# EAGLE board monjolo_b (EAGLE 5.11)
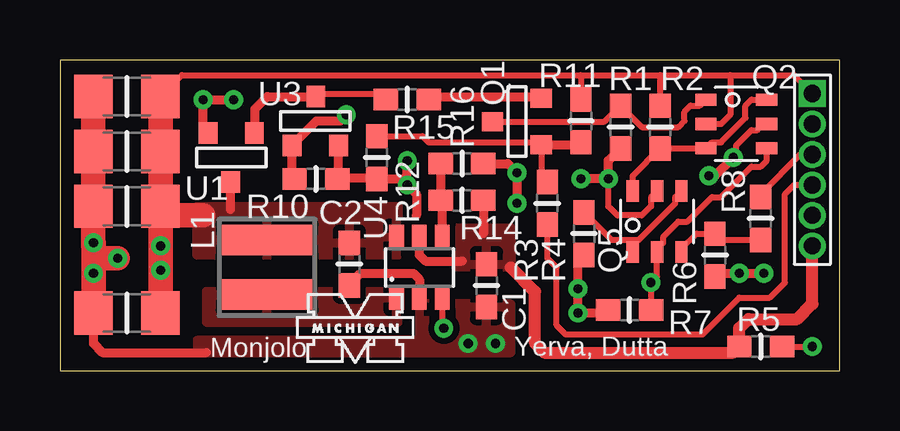
[diagram p0: board, top side]
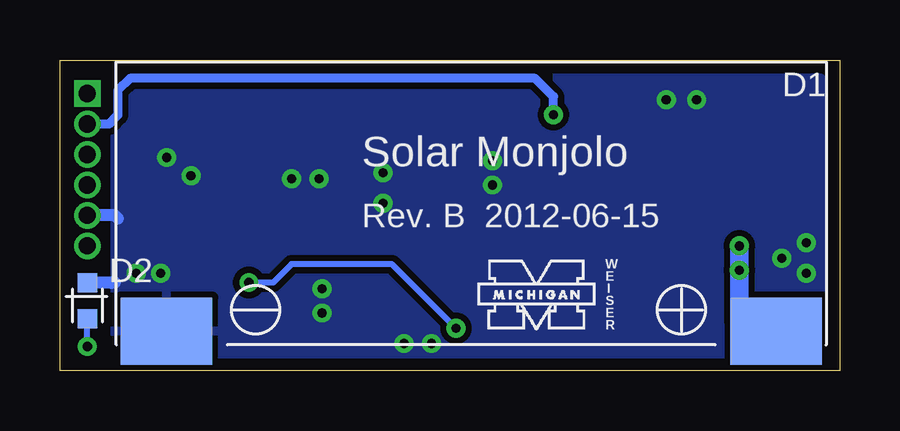
[diagram p1: board, bottom side, seen from below]

Size 32.51 x 12.95 mm. Coordinates in mm from the lower left corner, seen from the top.
Outline: 32.51,0 32.51,12.95 0,12.95 0,0 32.51,0
Copper layers (1*16): Top 0.0178mm / dielectric 1.4986mm / Bottom 0.0178mm
Design rules "SSC-EAGLE-2Lyr_v1.0.0.3 *": minimum track width 6mil, minimum drill 14mil, track to track 6mil, track to pad 6mil, pad to pad 6mil, via to via 6mil, smd to smd 6mil, copper to edge 20mil, drill to drill 16mil, minimum pad ring 8mil, minimum via ring 8mil, stop-mask expansion 3mil, vias tented up to drill 20mil, thermal gap 10mil

## Footprints (pad centres in the part's own frame; a part is rotated, then mirrored left to right if it is on the bottom)
R0603B = smd 1.016 x 0.889: 1 -0.889,0; 2 0.889,0
C1206 = smd 1.6 x 1.8: 1 -1.4,0; 2 1.4,0
AM-1437 = smd 3.81 x 2.794: + 12.7,-5.334; - -12.7,-5.334
LED-0603 = smd 0.8 x 0.8: A 0,-0.75; C 0,0.75
HD6 = drill 0.711 pad 1.016 square: 1 -2.54,0 | drill 0.711 pad 1.016 round: 2 -1.27,0; 3 0,0; 4 1.27,0; 5 2.54,0; 6 3.81,0
L2828 = smd 1.27 x 3.81: 1 -1.143,0; 2 1.143,0
SOT-23 = smd 0.787 x 0.889: 1 0.025,-1.016; 2 -0.94,1.016; 3 0.991,1.016
TSOP-6 = smd 0.508 x 0.889: 1 -1.016,-1.27; 2 0,-1.27; 3 1.016,-1.27; 4 1.016,1.27; 5 0,1.27; 6 -1.016,1.27
MINI-3DC = smd 0.787 x 0.889: 1 -0.991,-1.016; 2 0.94,-1.016; 3 0,1.016
SOT-23-6 = smd 0.61 x 1.016: 1 -0.953,-1.27; 2 0,-1.27; 3 0.953,-1.27; 4 0.953,1.27; 5 0,1.27; 6 -0.953,1.27

## Placement (x,y rotation side)
C1  10uF  [R0603B]  17.78,3.56 270 top
C1A  TBD  [C1206]  2.79,11.43 180 top
C1B  TBD  [C1206]  2.79,9.14 180 top
C1C  TBD  [C1206]  2.79,6.86 180 top
C1D  TBD  [C1206]  2.79,2.41 180 top
C2  4.7uF  [R0603B]  12.06,4.45 270 top
D1  AM-1437  [AM-1437]  15.37,6.99 0 bottom
D2  [LED-0603]  31.37,2.92 0 bottom
JP1  [HD6]  31.37,9.02 270 top
L1  4.7uH  [L2828]  8.64,4.32 270 top
Q1  [SOT-23]  19.05,10.41 270 top
Q2  DUAL_MOSFET_NP  [TSOP-6]  28.19,10.29 270 top
Q5  DUAL_MOSFET_NP  [TSOP-6]  24.89,6.22 0 top
R1  100K  [R0603B]  23.37,10.16 270 top
R2  1M  [R0603B]  25.02,10.16 270 top
R3  1K  [R0603B]  20.32,6.99 90 top
R4  1M  [R0603B]  21.84,5.71 270 top
R5  470  [R0603B]  29.21,1.02 0 top
R6  100K  [R0603B]  27.3,4.83 270 top
R7  1M  [R0603B]  23.75,2.54 180 top
R8  1K  [R0603B]  29.21,6.35 270 top
R10  1K  [R0603B]  10.67,8 0 top
R11  100K  [R0603B]  21.72,10.41 270 top
R12  DNP  [R0603B]  13.21,8.89 270 top
R14  976K  [R0603B]  16.76,7.11 180 top
R15  100K  [R0603B]  14.48,11.3 0 top
R16  649K  [R0603B]  16.76,8.64 0 top
U1  MN1382S 2.0V  [MINI-3DC]  7.11,8.89 180 top
U3  TC54VC 2.9V  [MINI-3DC]  10.67,10.41 0 top
U4  MCP1640T  [SOT-23-6]  14.99,4.32 0 top
U$1  [UMICH]  15.18,1.52 0 bottom
U$2  [UMICH]  9.78,0.13 0 top

## Library data of the parts
C1 C2 JP1 L1 R1-R8 R10-R12 R14-R16 U4 = Gecko
C1A C1B C1C C1D D1 D2 U1 U3 U$1 U$2 = umich
Q1 = berkeley-epic
Q2 Q5 =  gecko_vreg_revC

## Nets
GND: C1.2 C1A.2 C1B.2 C1C.2 C1D.2 C2.2 D1.- D2.C JP1.5 Q2.5 Q5.5 R1.2 R4.2 R6.2 R7.2 R10.2 R12.2 R16.2 U1.2 U3.2 U4.2
N$1: R14.2 R16.1 U4.4
N$2: Q1.2 R15.2
N$4: L1.2 U4.1
N$5: D2.A R5.2
N$6: Q5.1 Q5.4 R4.1
N$7: Q1.1 Q2.1 R1.1
N$8: JP1.3 R8.1
N$9: Q2.3 Q2.6 Q5.6 R2.2
N$12: Q5.3 R6.1 R8.2
N$13: JP1.2 R10.1 U3.1
N$14: R15.1 U1.1 U3.3
N$15: Q1.3 R3.2 R11.2 R12.1
N$16: JP1.4 R3.1
N$18: Q2.4 Q5.2 R7.1 U4.3
VCAP: C1A.1 C1B.1 C1C.1 C1D.1 C2.1 D1.+ JP1.1 L1.1 Q2.2 R2.1 R11.1 U1.3 U4.6
VREG: C1.1 JP1.6 R5.1 R14.1 U4.5

## Tracks (layer width: path | path; a pad name or v marks a point on that pad's centre or on a via)
GND  (via drill 0.38)
  Top 0.254: Q2.5 29.34,10.29 29.08,10.03 28.83,10.03 28.19,9.4 28.19,9.02 v28.07,8.89 | v22.86,8 22.86,6.86 23.24,6.48 24.26,6.48 24.64,6.86 24.64,7.24 Q5.5
  Top 0.381: C2.2 12.09,3.62 12.53,4.06 14.73,4.06 14.99,3.81 U4.2 | v14.48,7.75 14.86,7.37 14.86,6.48 | 1.4,2.29 1.4,1.14 1.78,0.76 6.1,0.76 | U1.2 5.97,10.11 v5.97,11.3 v7.24,11.3 | 11.61,8.05 U3.2 | R10.2 11.61,8.05 | 11.61,8.05 13.16,8.05 R12.2 14.48,8 v14.48,7.75 | v14.48,7.75 v14.48,8.76 | R16.2 18.67,8.64 v19.05,8.26 v19.05,6.99 | R1.2 22.86,8.76 v22.86,8 v21.72,8 | R4.2 21.59,4.57 v21.59,3.43 v21.59,2.41 23.11,2.41 R7.2 | R6.2 27.43,4.06 v28.32,4.06 v29.34,4.06 | v28.07,8.89 27.3,8.13 v27.05,8.13
  Top 0.508: v1.4,5.33 1.39,5.21
  Top 0.762: C1D.2
  Top 1.016: C1A.2 C1B.2 C1C.2 1.39,5.21 | 1.4,4.7 v1.4,5.33 | 1.4,4.7 v2.41,4.7 | C1D.2 v1.4,4.06 1.4,4.7
  Bottom 0.508: JP1.5 30.23,6.48 30.1,6.35 | D2.C 30.36,3.67 30.23,3.68
  other vias: 18.16,1.14 17.02,1.14
  pour Bottom (isolate 0.254): 0.76,0.64 0.76,12.19 30.23,12.19 30.23,0.64
  pour Top (isolate 0.254): 5.71,1.27 5.71,0.76 18.8,0.76 18.8,2.79 14.99,2.79 14.99,1.27
N$1
  Top 0.381: R16.1 R14.2 15.94,7.11 U4.4
N$2
  Top 0.381: Q1.2 19.99,11.43 15.49,11.43 R15.2
N$4
  pour Top (isolate 0.254): 14.1,3.3 6.1,3.3 6.1,2.03 14.1,2.03
N$5  (via drill 0.38)
  Top 0.254: R5.2 v31.37,1.02
  Bottom 0.254: v31.37,1.02 D2.A
N$6
  Top 0.254: Q5.4 25.65,7.24 25.65,6.99 24.13,5.46 23.88,5.46 | 23.88,5.46 Q5.1 | R4.1 22.99,5.46 23.88,5.46
N$7
  Top 0.254: R1.1 23.37,11.25 | Q1.1 22.71,10.39 R1.1 | R1.1 24.26,10.16 25.78,10.16 26.04,10.41 26.04,10.79 26.29,11.05 26.67,11.05 Q2.1
N$8
  Top 0.254: JP1.3 30.86,9.02 29.21,7.37 R8.1
N$9
  Top 0.254: Q2.6 28.83,11.3 28.57,11.05 28.57,10.54 27.56,9.53 27.18,9.53 Q2.3 R2.2 23.88,8.13 Q5.6
N$12
  Top 0.254: Q5.3 25.91,5.08 26.54,5.71 R6.1 27.56,5.46 R8.2
N$13  (via drill 0.38)
  Top 0.381: R10.1 9.68,8.1 U3.1 10.69,10.41 11.68,10.41 v11.94,10.67
  Bottom 0.381: v11.94,10.67 11.94,11.43 12.7,12.19 29.59,12.19 30.1,11.68 30.1,10.67 30.48,10.29 JP1.2
N$14
  Top 0.254: R15.1 13.34,11.56 10.79,11.56 U3.3
  Top 0.381: U3.3 8.64,11.43 8.13,10.92 8.13,9.93 U1.1
N$15
  Top 0.254: R12.1 15.11,9.78 15.37,9.53 19.96,9.53 Q1.3 20.07,8.13 R3.2
  Top 0.381: Q1.3 21.61,9.42 R11.2
N$16
  Top 0.254: JP1.4 30.61,7.75 30.23,7.37 30.23,3.68 29.59,3.05 28.32,3.05 26.8,1.52 21.08,1.52 20.7,1.91 20.7,4.32 20.32,4.7 R3.1
N$18  (via drill 0.38)
  Top 0.254: U4.3 15.94,1.84 v16,1.78 | v24.64,3.68 24.77,3.68 | v24.64,3.68 R7.1 | v24.64,3.68 24.89,3.94 Q5.2 24.89,5.08 25.15,5.33 25.15,5.59 25.78,6.22 26.16,6.22 27.18,7.24 27.56,7.24 28.83,8.51 29.21,8.51 29.46,8.76 Q2.4
  Bottom 0.254: v16,1.78 18.67,4.45 22.86,4.45 23.62,3.68 v24.64,3.68
VCAP  (via drill 0.38)
  Top 0.254: C1A.1 5.08,12.32 21.72,12.32 | 21.72,12.32 R11.1 | JP1.1 30.61,12.32 27.94,12.32 | 21.72,12.32 25.02,12.32 | 25.02,12.32 27.94,12.32 | 25.02,12.32 R2.1 | Q2.2 27.56,10.29 27.94,10.67 27.94,12.32
  Top 0.381: 7.11,6.73 U1.3
  Top 0.762: C1D.1 4.19,2.29 | C1C.1 4.19,6.48
  Top 1.016: C1A.1 C1B.1 C1C.1 | C1D.1 v4.19,4.19 v4.19,5.21 4.19,6.48 5.97,6.48
  Bottom 0.762: v4.19,5.21 v4.19,4.19 4.19,2.08 D1.+
  pour Top (isolate 0.254): 5.71,6.86 14.1,6.86 14.1,4.83 5.71,4.83
VREG
  Top 0.381: U4.5 14.99,4.83 15.24,4.57 16.76,4.57 | R14.1 17.65,5.71
  Top 0.508: 18.8,4.32 19.81,3.3 19.81,1.14 20.19,0.76 28.07,0.76 R5.1 28.32,1.78 28.7,2.16 30.73,2.16 31.37,2.79 JP1.6
  pour Top (isolate 0.254): 16.51,5.97 18.8,5.97 18.8,4.32 16.51,4.32

## Text on the board
tPlace: Monjolo | Yerva, Dutta
bPlace: Solar Monjolo | Rev. B 2012-06-15 | E | W | I | S | E | R
tValues: VCAP | N_P_MOS | OV | PMOS | SHD | TRIG | N_P_MOS | GND | VREG